# Altium PCB PCB.PcbDoc
Units mm, origin at the board's own origin, x right, y up, seen from the top; angles counter-clockwise.
Board outline 90 x 86.56 mm, 2 copper layers (Top Layer, Bottom Layer); 37 components, 29 nets, 147 pads, 1 vias.
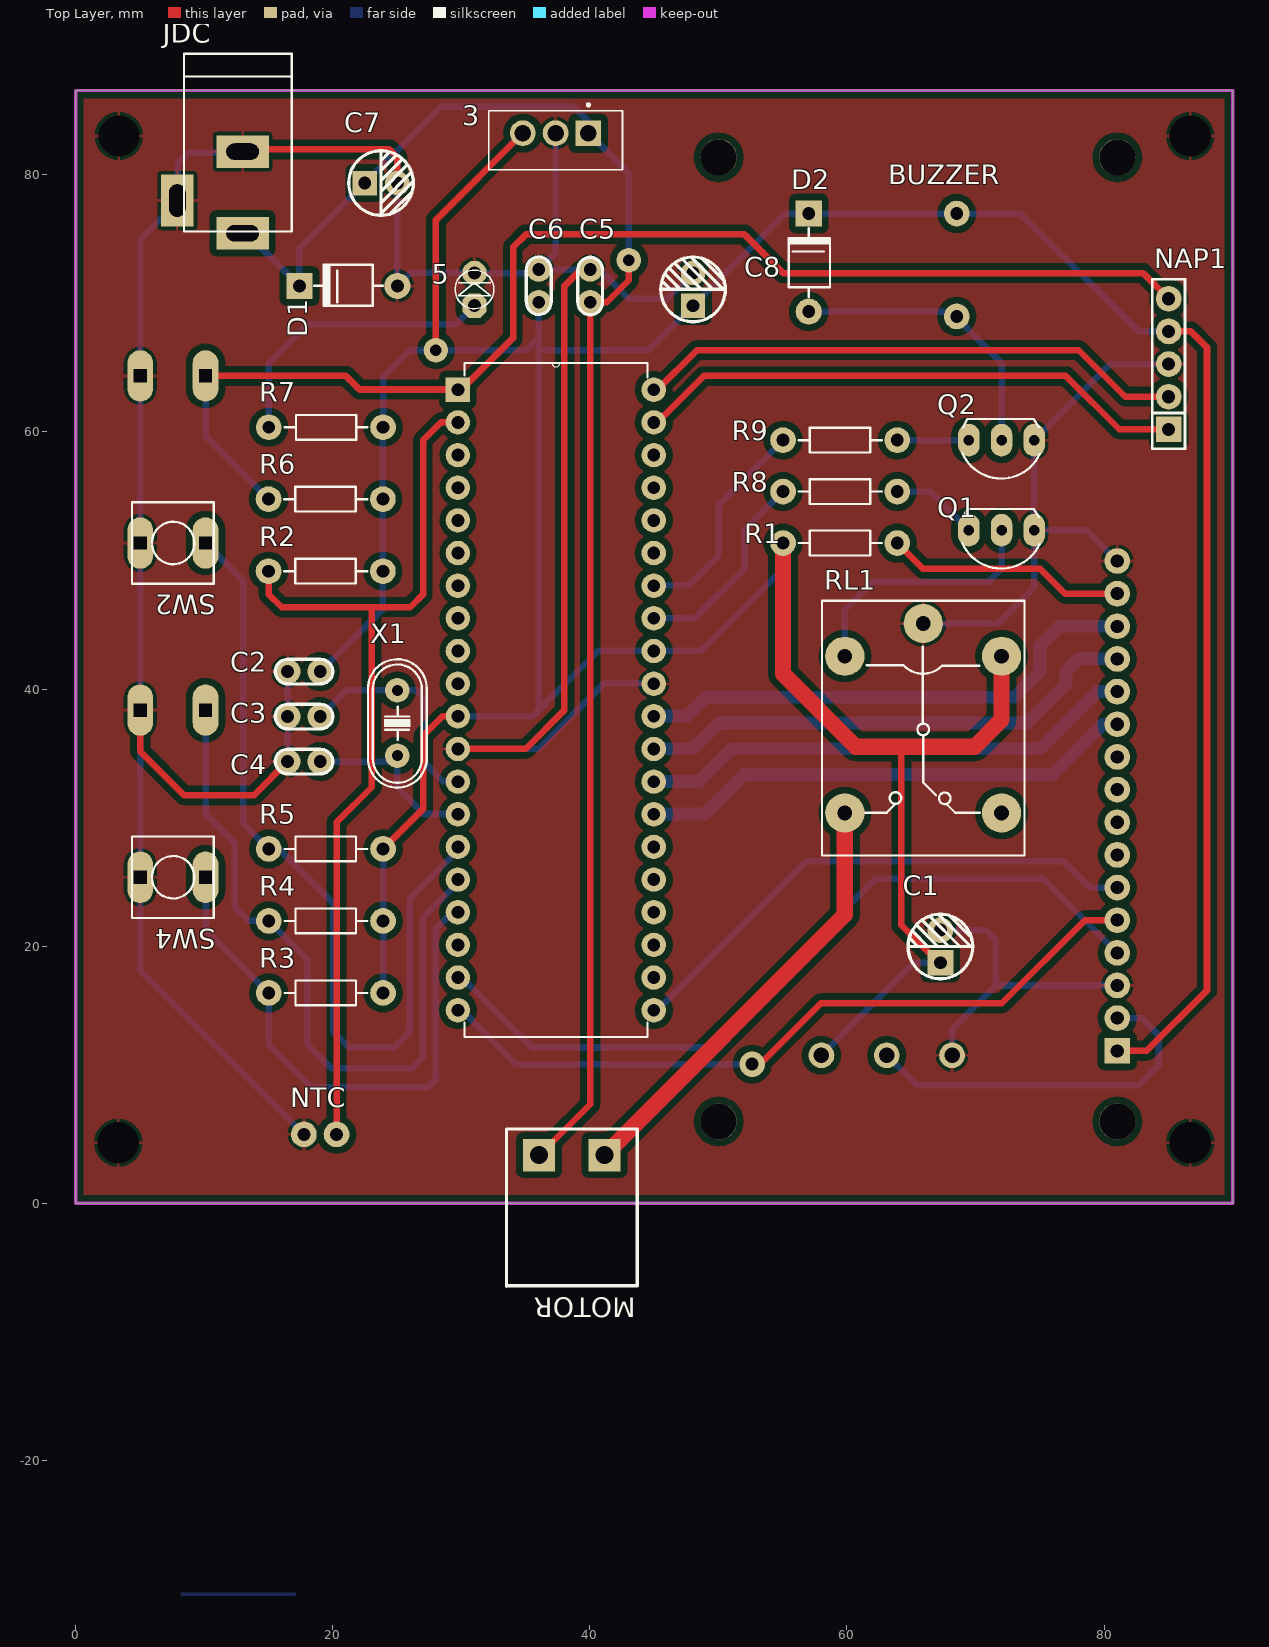
[diagram p0: Top Layer view]
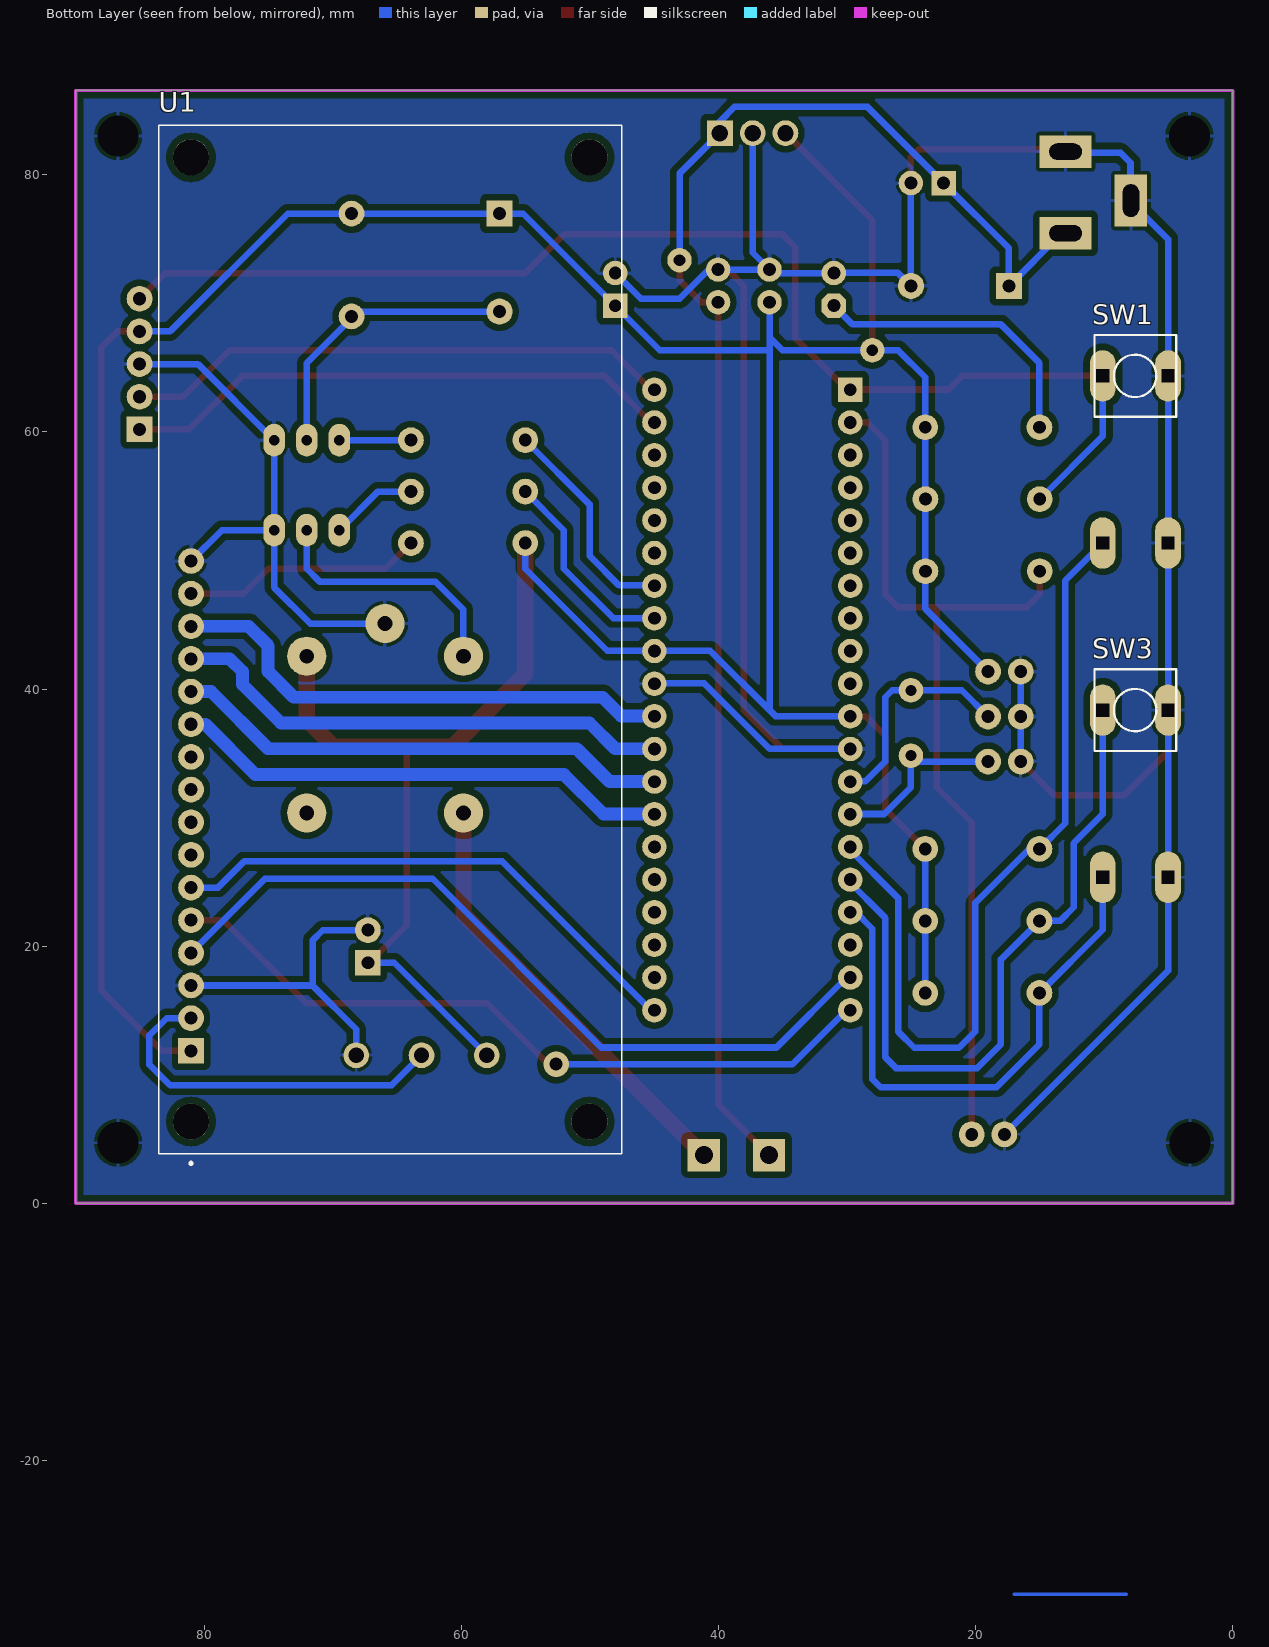
[diagram p1: Bottom Layer view, seen from below]

## Layer stack, top to bottom
Top Solder: solder mask 0.0102, Solder Resist, Dk 3.5
Top Layer: signal copper 0.0356
Dielectric 1: dielectric 0.32, FR-4, Dk 4.8
Bottom Layer: signal copper 0.0356
Bottom Solder: solder mask 0.0102, Solder Resist, Dk 3.5

## Board outline
0,0 0,86.565 90,86.565 90,0

## Design rules (kind name [scope] priority, off if disabled: settings)
Clearance [All] p1: gap=0.508 ignorepadtopadclearanceinfootprint=FALSE
PolygonConnect [All] p1: connectstyle=Relief reliefconductorwidth=0.254 reliefentries=4 polygonreliefangle="90 Angle" airgapwidth=0.254
RoutingVias [All] p1: holewidth=0.711 width=1.27 viastyle="Through Hole" minholewidth=0.711 minwidth=1.27 maxholewidth=0.711 maxwidth=1.27
SolderMaskExpansion [All] p1: expansion=0.102
Width [All] p1: maxlimit=1.27 minlimit=0.254 preferedwidth=0.508
30 further rules are at their usual default settings.

## Classes and differential pairs
component class schematic: 3 5 C1 C2 C3 C4 C5 C6 C7 C8 D1 D2 JDC MOTOR NAP1 NTC Q1 Q2 R1 R2 R3 R4 R5 R6 R7 R8 R9 RL1 SW1 SW2 SW3 SW4

## Components (designator, comment, footprint, x,y, rotation, side; value= is the part's Value field where it differs from the comment)
3 "L7805CV" TO255P1040X460X1968-3 39.885,83.247 r180 top
5 "LED" LED-3MM-GREEN 31.025,69.822 r90 top
BUZZER "CCG-1206" PCBComponent_1#1 68.536,68.986 r90 top
C1 "10uF" "tu hoa 5mm"#1 67.267,19.976 r90 top
C2 "0.1uF" "tu gom"#1 17.755,41.362 r180 top
C3 "22nF" "tu gom"#1 17.755,37.862 r180 top
C4 "22nF" "tu gom"#1 17.755,34.362 r180 top
C5 "33nF" "tu gom"#2 40.025,71.362 r90 top
C6 "33nF" "tu gom"#2 36.025,71.362 r270 top
C7 "1uF" "tu hoa 5mm"#2 23.755,79.362 r0 top
C8 "470uF" "tu hoa 5mm"#2 48.025,71.092 r90 top
D1 "100v" "DIODE 1A" 26.295,71.362 r0 top
D2 "100v" "DIODE 1A" 57.025,68.092 r270 top
JDC "Jac DC" DC-IN 10.453,78.633 r270 top
MOTOR "" "CON 2 2EDG5.08" 41.136,3.74 r180 top
NAP1 "JP5" JP5-C1T 85.025,60.202 r90 top
NTC "GA1K2A1" PCBComponent_1#2 20.295,3.457 r180 top
Q1 "C2383" QTO-92 72.025,52.362 r180 top value=C1815
Q2 "C2383" QTO-92 72.025,59.362 r180 top value=C1815
R1 "Res1" R1/4W 63.915,51.362 r180 top value=560
R2 "Res1" R1/4W 23.9,49.169 r180 top value=1K
R3 "Res1" R1/4W 23.915,16.362 r180 top value=10K
R4 "Res1" R1/4W 23.915,21.964 r180 top value=10K
R5 "Res1" R1/4W 23.915,27.567 r180 top value=10K
R6 "Res1" R1/4W 23.9,54.772 r180 top value=10K
R7 "Res1" R1/4W 15.025,60.362 r0 top value=4k7
R8 "Res1" R1/4W 63.915,55.362 r180 top value=1K
R9 "Res1" R1/4W 63.915,59.362 r180 top value=1K
RL1 "Relay 10A/12V" "RELAY 5" 65.929,36.839 r270 top value="Relay SPDT, 10A, 12V"
SW1 "SW" SW2 10.105,64.362 r180 bottom value="SW chip 2 pin"
SW2 "SW" SW2 10.105,51.362 r180 top value="SW chip 2 pin"
SW3 "SW" SW2 10.105,38.362 r180 bottom value="SW chip 2 pin"
SW4 "SW" SW2 10.105,25.362 r180 top value="SW chip 2 pin"
U1 "LCD-16X2" MODULE_LCD-16X2 65.525,43.862 r90 bottom
X1 "20Mhz" XT2 25.025,37.362 r90 top value=4Mhz
? "PIC16F877A-IPG" DIP254P1524X483-40 44.977,15.02 r0 top
? "10K" B10K 58.015,11.51 r0 top

## Footprints (in the part's own frame and the unit in brackets; to place one, negate y for a bottom-side part, rotate by r counter-clockwise, add the part's x,y. Pads: shape width x height; smd on the part's side, far side on the other; paste and mask are expansions set on the pad)
B10K [mm]
  round 2 hole 1.2: 1(0,0) 2(5.08,0) 3(10.16,0)
"CON 2 2EDG5.08" [mm]
  rect 2.5x2.5 hole 1.4: 1(0,0) 2(5.08,0)
  silkscreen extent -2.54,-2.03 7.62,10.21, body extent -2.5,-1.75 7.58,10.25, height 3.15
DC-IN [mil] "Jac DC input"
  rect 100x160 hole 50 slot 100 at 90 deg: 1(125,100) 2(-125,100)
  rect 160x100 hole 50 slot 100 at 0 deg: 3(25,-100)
  silkscreen extent -425,-80 120,250, body extent -410,-105 134,269, height 434
"DIODE 1A" [mil] "Diode 1A"
  round 80 hole 39.37: 1(-50,0)
  rect 80x80 hole 39.37: 2(-350,0)
  silkscreen extent -305,-61 -95,65, body extent -366,-61 -34,65, height 122
DIP254P1524X483-40 [mm]
  rect 1.9x1.9 hole 0.991: 1(-15.24,48.26)
  round 1.9 hole 0.991: 2(-15.24,45.72) 3(-15.24,43.18) 4(-15.24,40.64) 5(-15.24,38.1) 6(-15.24,35.56) 7(-15.24,33.02) 8(-15.24,30.48) 9(-15.24,27.94) 10(-15.24,25.4) 11(-15.24,22.86) 12(-15.24,20.32) 13(-15.24,17.78) 14(-15.24,15.24) 15(-15.24,12.7) 16(-15.24,10.16) 17(-15.24,7.62) 18(-15.24,5.08) 19(-15.24,2.54) 20(-15.24,0) 21(0,0) 22(0,2.54) 23(0,5.08) 24(0,7.62) 25(0,10.16) 26(0,12.7) 27(0,15.24) 28(0,17.78) 29(0,20.32) 30(0,22.86) 31(0,25.4) 32(0,27.94) 33(0,30.48) 34(0,33.02) 35(0,35.56) 36(0,38.1) 37(0,40.64) 38(0,43.18) 39(0,45.72) 40(0,48.26)
  silkscreen extent -14.73,-2.08 -0.51,50.34
JP5-C1T [mm] "5 row, straight, gold plating"
  rect 2x2 hole 1.02: 1(0,0)
  round 2 hole 1.02: 2(2.54,0) 3(5.08,0) 4(7.62,0) 5(10.16,0)
  silkscreen extent -1.52,-1.27 11.68,1.27, body extent -1.52,-1.25 11.68,1.25, height 8.51
LED-3MM-GREEN [mm]
  oct 1.9x1.9 hole 1.016: 1(0,0)
  round 1.9 hole 1.016: 2(2.54,0)
  silkscreen extent -0.23,-1.5 2.77,1.5, body extent -0.38,-1.78 2.83,1.52, height 4.63
MODULE_LCD-16X2 [mm]
  rect 2x2 / inner round 2 / far side rect 2x2 hole 1.016: 1(-32,15.5)
  round 2 hole 1.016: 2(-29.46,15.5) 3(-26.92,15.5) 4(-24.38,15.5) 5(-21.84,15.5) 6(-19.3,15.5) 7(-16.76,15.5) 8(-14.22,15.5) 9(-11.68,15.5) 10(-9.14,15.5) 11(-6.6,15.5) 12(-4.06,15.5) 13(-1.52,15.5) 14(1.02,15.5) 15(3.56,15.5) 16(6.1,15.5)
  round 2.8 hole 2.8 unplated: ""(-37.5,-15.5) ""(-37.5,15.5) ""(37.5,-15.5) ""(37.5,15.5)
  silkscreen extent -40.85,-18 40,18
PCBComponent_1#1 [mm]
  round 2 hole 1: 1(0,0) 2(8.001,0)
PCBComponent_1#2 [mm]
  round 2 hole 1: 1(0,-1.905) 2(2.54,-1.905)
QTO-92 [mil] "TO-92"
  oval 66x100 hole 32: 1(-100,0) 2(0,0) 3(100,0)
  silkscreen extent -117,-65 120,118, body extent -109,-66 109,95, height 245
R1/4W [mm] "R 1/4W, 2 Pin, 350mil"
  round 2 hole 1: 1(0,0) 2(8.89,0)
  silkscreen extent 1.22,-0.97 7.67,0.97, body extent -1.01,-1.19 9.79,1.21, height 2.83
"RELAY 5" [mil] "Reley DPDT, 8 pin, 1A, W400mil, L800mil,H 300mil"
  round 120 hole 45: 1(-325,0) 2(255,240) 3(255,-240) 4(-225,-240) 5(-225,240)
  silkscreen extent -395,-310 385,310, body extent -371,-304 381,306, height 602
SW2 [mm] "SW button 2pin, 250x 250 mil"
  oval 2x4 hole 1 square: 1(0,0) 2(5.08,0)
  silkscreen extent -0.64,-3.18 5.72,3.17
TO255P1040X460X1968-3 [mm]
  rect 2x2 / inner round 2 / far side rect 2x2 hole 1.27: 1(0,0)
  round 2 hole 1.27: 2(2.55,0) 3(5.1,0)
  silkscreen extent -2.65,-2.29 7.75,2.86, body extent -4.98,-1.76 4.98,2.69, height 19.68
"tu gom"#1 [mm] "Tu gom mini"
  round 2 hole 1: 1(-1.27,0) 2(1.27,0)
  silkscreen extent -2.25,-0.97 2.22,0.97, body extent -2.92,-0.85 2.92,0.85, height 6.12
"tu gom"#2 [mm] "Tu gom mini"
  round 1.9 hole 1: 1(-1.27,0) 2(1.27,0)
  silkscreen extent -2.25,-0.97 2.22,0.97, body extent -2.92,-0.85 2.92,0.85, height 6.12
"tu hoa 5mm"#1 [mm]
  rect 2x2 hole 1: 1(-1.27,0)
  round 2 hole 1: 2(1.27,0)
  silkscreen extent -2.51,-2.51 2.51,2.51, body extent -3.12,-3.18 3.23,3.18, height 14.55
"tu hoa 5mm"#2 [mm]
  rect 1.9x1.9 hole 1: 1(-1.27,0)
  round 1.9 hole 1: 2(1.27,0)
  silkscreen extent -2.51,-2.51 2.51,2.51, body extent -3.12,-3.18 3.23,3.18, height 14.55
XT2 [mil] "Footpin for Crystal 2 pin"
  round 75 hole 34: 1(-100,0) 2(100,0)
  silkscreen extent -198,-90 195,90, body extent -233,-93 213,90, height 138

## Part data
3: "Linear Voltage Regulator IC Positive Fixed 1 Output 1.5A TO-220", Package="TO-220-3 ON Semiconductor", Availability="In Stock", Check_prices=https://www.snapeda.com/parts/L7805CV/STMicroelectronics/view-part/?ref=eda, MF=STMicroelectronics, MP=L7805CV, Price=None, Purchase-URL=https://pricing.snapeda.com/search/part/L7805CV/?ref=eda, SnapEDA_Link=https://www.snapeda.com/parts/L7805CV/STMicroelectronics/view-part/?ref=snap
5: library part "LED 3mm Xanh La", "C?m", Chung_Loai=C?m, Don_Vi=Con, Ma_Hang=MH001054, Ten_Linh_Kien="Led 3MM Ph? Xanh (10c)"
BUZZER: "12 mm, 5 V, 85 dB, Through Hole, Sealed, Magnetic Audio Transducer Buzzer", Package=None, Availability=Unavailable, MP=CCG-1206, Price=None
C1 C7 C8: library part "Tu Hoa 1uF 50V 5x11", "C?m", Chung_Loai=C?m, Don_Vi=Con, Ma_Hang=MH001355, So_Chan=2, Ten_Linh_Kien="T? Hóa 1uF 50V 5x11MM"
C2 C3 C4 C5 C6: library part "Tu gom 222 50V", "C?m", Chung_Loai=C?m, Don_Vi=Con, Ma_Hang=MH004770, So_Chan=2, Ten_Linh_Kien="T? g?m 222-2.2nF 50V"
D1 D2: library part "Diode 1N4007", "C?m", Chung_Loai=C?m, Don_Vi=Con, Ma_Hang=MH001063, Ten_Linh_Kien="Diode 1N4007 1A (DIP)"
JDC: library part DCIN, "Jac DC input"
MOTOR: library part "CON 2 EDG5.08", "C?m", Chung_Loai=C?m, Don_Vi=Con, Ma_Hang=MH000759, Ten_Linh_Kien="CON 2 2EDG5.08-2P 5.08MM ( Xanh Cong)"
NAP1: "WR-PHD 2.54 mm Angled Socket Header", Manufacturer="W¨¹rth Elektronik eiSos GmbH", partNo=613005143121, ComponentLink1 Description=Manufacturer, ComponentLink1URL=http://www.we-online.com, ComponentLink2 Description=Datasheet, ComponentLink2URL=http://katalog.we-online.de/em/datasheet/6130xx143121.pdf, Created by="Karrer Zheng", Created Date="29 March 2013", NoPins=05
NTC: "DISCRETE THERMISTOR,+/-0.2C FROM 0C TO 70C, 32 AWG", Package="Epoxy Radial Discrete", Availability=Warning, MF="TE Connectivity", MP=GA1K2A1, Price=None, Purchase-URL=https://pricing.snapeda.com/search/part/GA1K2A1/?ref=eda, SnapEDA_Link=https://www.snapeda.com/parts/GA1K2A1/TE%20Connectivity%20/%20DEUTSCH/view-part/1314624/?ref=snap
Q1 Q2: library part NPN_ECB, "P 600mW, ECB", =C2383
R1 R2 R3 R4 R5 R6 R7 R8 R9: library part Res1_4, "Resistor", Manufacturer="Generic Components", Class=Passive, Published=08/06/2000, Publisher="Altium Hobart Technology Centre", SubClass=Resistor
RL1: library part "Relay 5", "Relay SPDT,10A - 12VDC 5 Pin", ="Relay SPDT, 10A, 24V"
SW1 SW2 SW3 SW4: library part SW2, "Switch button 2 pin"
U1: "Display Development Tools 16x2 Black on Green Char LCD w Backlight", Package=None, Availability="Not in stock", Check_prices=https://www.snapeda.com/parts/LCD-16X2/Gravitech/view-part/?ref=eda, MF=Gravitech, MP=LCD-16X2, Price=None, SnapEDA_Link=https://www.snapeda.com/parts/LCD-16X2/Gravitech/view-part/?ref=snap
X1: library part XT2, "Crystal For all Crystal 2pin."
?: "Mcu Cmos 40ld 20mhz 8k Flash", Package=None, Availability=Unavailable, MF=Microchip, MP=PIC16F877A-I/PG, Price=None, SnapEDA_Link=https://www.snapeda.com/parts/PIC16F877A-I/PG/Microchip/view-part/2768201/?ref=snap
?: library part "Bien Tro Tinh Chinh 10K Dung", "C?m", Chung_Loai=C?m, Don_Vi=Con, Ma_Hang=MH003232, Ten_Linh_Kien="Bi?n Tr? VR 103-10K 3296W"

## Free pads (board coordinates)
  round 1.524 hole 3.2: 1(3.361,83.028) 2(86.698,83.015) 5(3.316,4.706) 6(86.698,4.706)
  round 1.9 hole 0.9: 7(28.025,66.362) 8(43.025,73.362)

## Via types
v1: diameter 2, hole 1, Top Layer to Bottom Layer, 1 vias

## Nets (pads, with @x,y where several pads share a name; then routed paths per layer and width w, separated by ;. In a path a pad name is that pad's centre, name@x,y a point inside that pad or via, vN(x,y) a via of type N, cw(c..) or ccw(c..) an arc to the next point about the centre after c; other vN are vias at no path point)
+5: 3.3 ?.1@58.015,11.51 ?.11 ?.32 C1.1 C2.1 C6.2 C8.1 D2.2 NAP1.4 pad.7 R1.2 R2.1 R3.1 R4.1 R5.1 R6.1 R7.2 RL1.5 U1.1 | length 331.7
  Top Layer w0.508: R5.1 27.025,30.677 27.025,36.362 28.565,37.902 ?.11@30.025,37.902 ; pad.7 28.025,76.487 3.3 ; 64.24,35.523 64.24,21.63 67.163,18.706 C1.1 ; U1.1 83.306,11.862 88.005,16.561 88.005,66.569 86.752,67.822 NAP1.4
  Top Layer w1.27: R1.2 55.025,41.186 60.689,35.523 64.24,35.523 69.929,35.523 72.025,37.619 RL1.5
  Bottom Layer w0.508: C2.1 23.9,46.237 R2.1 R6.1 23.9,60.347 R7.2 23.915,64.252 26.025,66.362 pad.7 35.025,66.362 36.025,67.362 ; R3.1 R4.1 R5.1 ; ?.11@30.025,37.902 35.565,37.902 36.025,38.362 ; C6.2 36.025,67.362 ; R1.2 55.025,49.362 48.645,42.982 40.645,42.982 36.025,38.362 ; ?.1@58.015,11.51 65.212,18.706 C1.1 ; NAP1.4 82.667,67.822 73.507,76.982 D2.2 55.185,76.982 C8.1 44.565,66.362 36.025,66.362 ; 36.025,38.362 36.025,66.362 ; 36.025,66.362 36.025,67.362
+12: 3.1 C5.1 C7.1 D1.2 JDC.1 MOTOR.2 pad.8 | length 121.8
  Top Layer w0.508: MOTOR.2 40.025,7.709 C5.1 41.315,70.092 43.025,71.802 pad.8
  Bottom Layer w0.254: JDC.1@13.025,75.362 JDC.1@13.405,75.362
  Bottom Layer w0.508: JDC.1@13.405,75.362 D1.2 17.405,74.282 C7.1 28.404,85.281 38.762,85.281 39.885,84.159 3.1 43.025,80.106 pad.8
GND: 3.2 5.2 ?.3@68.175,11.51 ?.12 ?.31 C1.2 C2.2 C3.2 C4.2 C5.2 C6.1 C7.2 C8.2 D1.1 JDC.2 JDC.3 NAP1.3 NTC.2 pad.1 pad.2 pad.5 pad.6 Q1.1 Q2.1 RL1.1 SW1.2 SW2.2 SW3.2 SW4.2 U1.3 U1.16 | length 300
  Top Layer w0.508: SW3.2 5.025,35.148 8.448,31.725 13.848,31.725 C4.2 ; JDC.2@13.025,81.712 13.287,81.974 24.413,81.974 25.025,81.362 C7.2 ; ?.12@30.025,35.362 35.025,35.362 38.025,38.362 38.025,71.362 39.295,72.632 C5.2
  Bottom Layer w0.254: JDC.2@13.025,81.712 JDC.2@13.675,82.362 ; C5.2 C5.2@40.755,72.632 ; C8.2@47.755,72.632 C8.2
  Bottom Layer w0.508: JDC.2@13.025,81.712 8.722,81.712 7.945,80.935 7.945,77.902 5.025,74.982 SW1.2 SW2.2 SW3.2 SW4.2 5.025,18.092 NTC.2 ; C4.2 C3.2 C2.2 ; C7.2 D1.1 26.065,72.402 30.985,72.402 5.2 35.755,72.362 C6.1 ; ?.12@30.025,35.362 36.025,35.362 41.105,40.442 ?.31@45.265,40.442 ; 3.2 37.335,73.942 C6.1 ; C5.2 C6.1 ; C5.2@40.755,72.632 43.025,70.362 46.025,70.362 C8.2 ; RL1.1 71.757,45.094 74.565,47.902 Q1.1 ; C1.2 70.777,21.246 71.572,20.452 71.572,16.942 ; ?.3@68.175,11.51 68.175,13.546 71.572,16.942 ; U1.3 71.572,16.942 ; U1.16 78.625,52.362 Q1.1 ; NAP1.3 80.485,65.282 Q2.1 Q1.1
Net5_1: 5.1 R7.1 | length 23.4
  Bottom Layer w0.254: 5.1@30.485,69.822 5.1
  Bottom Layer w0.508: R7.1 15.025,65.362 18.025,68.362 29.565,68.362 5.1
Net_2: ?.2@63.095,11.51 U1.2 | length 28.9
  Bottom Layer w0.508: ?.2@63.095,11.51 65.421,9.184 82.657,9.184 84.268,10.794 84.268,13.056 82.922,14.402 U1.2
NetBUZZER_M: D2.1 Q2.2 | length 22.7
  Bottom Layer w0.508: D2.1 68.025,69.362 72.025,65.362 Q2.2
NetMOTOR_1: MOTOR.1 RL1.3 | length 34.4
  Top Layer w1.27: MOTOR.1 59.833,22.437 RL1.3
NetQ1_2: Q1.2 RL1.4 | length 20.1
  Bottom Layer w0.508: RL1.4 59.833,46.17 62.025,48.362 71.025,48.362 72.025,49.362 Q1.2
NetQ1_3: Q1.3 R8.1 | length 6.8
  Bottom Layer w0.508: R8.1 66.485,55.362 Q1.3
NetQ2_3: Q2.3 R9.1 | length 5.6
  Bottom Layer w0.508: R9.1 Q2.3
NetR1_1: R1.1 U1.15 | length 18.7
  Top Layer w0.508: R1.1 65.915,49.362 75.025,49.362 76.965,47.422 U1.15
OSC1: ?.13 C3.1 X1.2 | length 17.7
  Bottom Layer w0.508: C3.1 21.065,39.902 X1.2 26.485,39.902 27.025,39.362 27.025,34.362 28.565,32.822 ?.13@30.025,32.822
OSC2: ?.14 C4.1 X1.1 | length 14.5
  Bottom Layer w0.508: C4.1 24.565,34.362 X1.1 25.025,32.362 27.105,30.282 ?.14@30.025,30.282
PGC: ?.39 NAP1.1 | length 43
  Top Layer w0.508: ?.39@45.265,60.762 48.865,64.362 77.025,64.362 81.185,60.202 NAP1.1
PGD: ?.40 NAP1.2 | length 42.5
  Top Layer w0.508: ?.40@45.265,63.302 48.325,66.362 78.025,66.362 81.645,62.742 NAP1.2
RA0: ?.2@29.737,60.74 NTC.1 R2.2 | length 72.4
  Top Layer w0.508: R2.2 15.01,47.378 16.025,46.362 23.025,46.362 ; NTC.1 20.295,29.632 23.025,32.362 23.025,46.362 ; ?.2@30.025,60.762 28.425,60.762 27.025,59.362 27.025,47.362 26.025,46.362 23.025,46.362
RB0: ?.33 R8.2 | length 15.6
  Bottom Layer w0.508: ?.33@45.265,45.522 48.185,45.522 52.025,49.362 52.025,52.362 R8.2
RB1: ?.34 R9.2 | length 16.8
  Bottom Layer w0.508: ?.34@45.265,48.062 47.725,48.062 50.025,50.362 50.025,54.362 R9.2
RC0: ?.15 R5.2 SW2.1 | length 65.7
  Bottom Layer w0.508: SW2.1 13.025,48.442 13.025,29.567 R5.2 15.82,27.567 20.025,23.362 20.025,13.362 21.287,12.1 24.763,12.1 25.993,13.33 25.993,23.71 ?.15@30.025,27.742
RC1: ?.16 R4.2 SW3.1 | length 55.6
  Bottom Layer w0.254: ?.16@29.865,25.362 ?.16@30.025,25.202
  Bottom Layer w0.508: SW3.1 10.105,30.282 12.367,28.02 12.367,23.02 13.423,21.964 R4.2 18.025,18.964 18.025,12.362 19.865,10.522 26.185,10.522 27.009,11.346 27.009,22.186 ?.16@30.025,25.202
RC2: ?.17 R3.2 SW4.1 | length 43.9
  Bottom Layer w0.508: SW4.1 10.105,21.282 R3.2 15.025,12.362 18.36,9.027 27.385,9.027 28.025,9.667 28.025,21.362 29.325,22.662 ?.17@30.025,22.662
RD0: ?.19 U1.4 | length 61.1
  Bottom Layer w0.508: ?.19@30.025,17.582 35.488,12.119 49.107,12.119 62.224,25.236 75.271,25.236 U1.4
RD1: ?.20 U1.5 | length 57.4
  Top Layer w0.508: v1(52.624,10.823) 53.238,10.823 57.976,15.56 72.049,15.56 78.511,22.022 U1.5
  Bottom Layer w0.508: ?.20@30.025,15.042 34.245,10.823 v1(52.624,10.823)
RD2: ?.21 U1.6 | length 41.4
  Bottom Layer w0.508: ?.21@45.265,15.042 56.816,26.593 76.895,26.593 78.926,24.562 U1.6
RD4: ?.27 U1.11 | length 38.7
  Bottom Layer w1: ?.27@45.265,30.282 48.945,30.282 52.025,33.362 76.025,33.362 79.925,37.262 U1.11
RD5: ?.28 U1.12 | length 38.7
  Bottom Layer w1: ?.28@45.265,32.822 48.485,32.822 51.025,35.362 75.025,35.362 79.465,39.802 U1.12
RD6: ?.29 U1.13 | length 39.3
  Bottom Layer w0.254: U1.13@81.005,42.362 U1.13
  Bottom Layer w1: ?.29@45.265,35.362 48.025,35.362 50.025,37.362 74.025,37.362 77.025,40.362 77.025,41.362 78.025,42.362 U1.13@81.005,42.362
RD7: ?.30 U1.14 | length 39.8
  Bottom Layer w1: ?.30@45.265,37.902 47.565,37.902 49.025,39.362 73.025,39.362 75.025,41.362 75.025,43.362 76.545,44.882 U1.14
RS: ?.1@29.737,63.28 NAP1.5 R6.2 SW1.1 | length 98.2
  Top Layer w0.508: SW1.1 21.025,64.362 22.085,63.302 30.025,63.302 34.025,67.302 34.025,74.362 35.025,75.362 52.025,75.362 55.025,72.362 83.025,72.362 NAP1.5
  Bottom Layer w0.508: SW1.1 10.105,59.676 R6.2
pads on no net: ?.3@29.737,58.2 ?.4 ?.5 ?.6 ?.7 ?.8 ?.9 ?.10 ?.18 ?.22 ?.23 ?.24 ?.25 ?.26 ?.35 ?.36 ?.37 ?.38 BUZZER.1 BUZZER.2 RL1.2 U1. U1.7 U1.8 U1.9 U1.10
copper on no net: | length 8.7
  Bottom Layer w0.254: 8.265,-30.42 17.013,-30.42

## Polygon pours and split planes (outlines as drawn)
GND on Top Layer "Top Layer-No Net" (solid, pour order 28): 0,86.565 90,86.565 90,0 0,0
GND on Bottom Layer "Top Layer-No Net" (solid, pour order 30): 0,86.565 90,86.565 90,-0.119 89.881,0 0,0

## Keep-outs
Keep-Out Layer:
  lines w0.254: 90,86.565 0,86.565 0,0 90,0 90,86.565 ; 90,86.565 90,86.565